# Altium PCB kitesp32_smartgarden.PcbDoc
Units mil, origin at the board's own origin, x right, y up, seen from the top; angles counter-clockwise.
Board outline 5245 x 4200 mil, 2 copper layers (Top Layer, Bottom Layer); 70 components, 49 nets, 356 pads, 70 vias.
Unrouted connection lines stored in the file: 3.
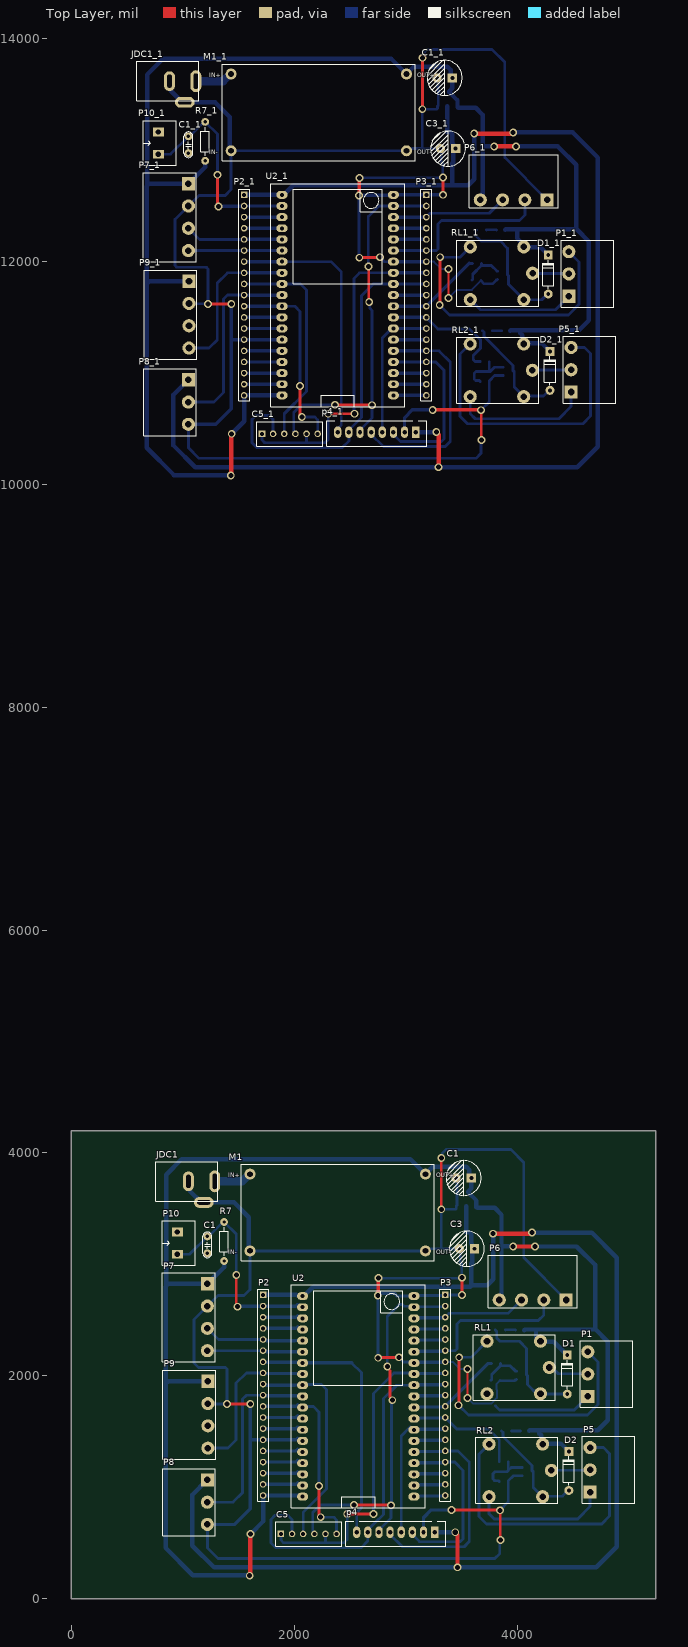
[diagram p0: Top Layer view]
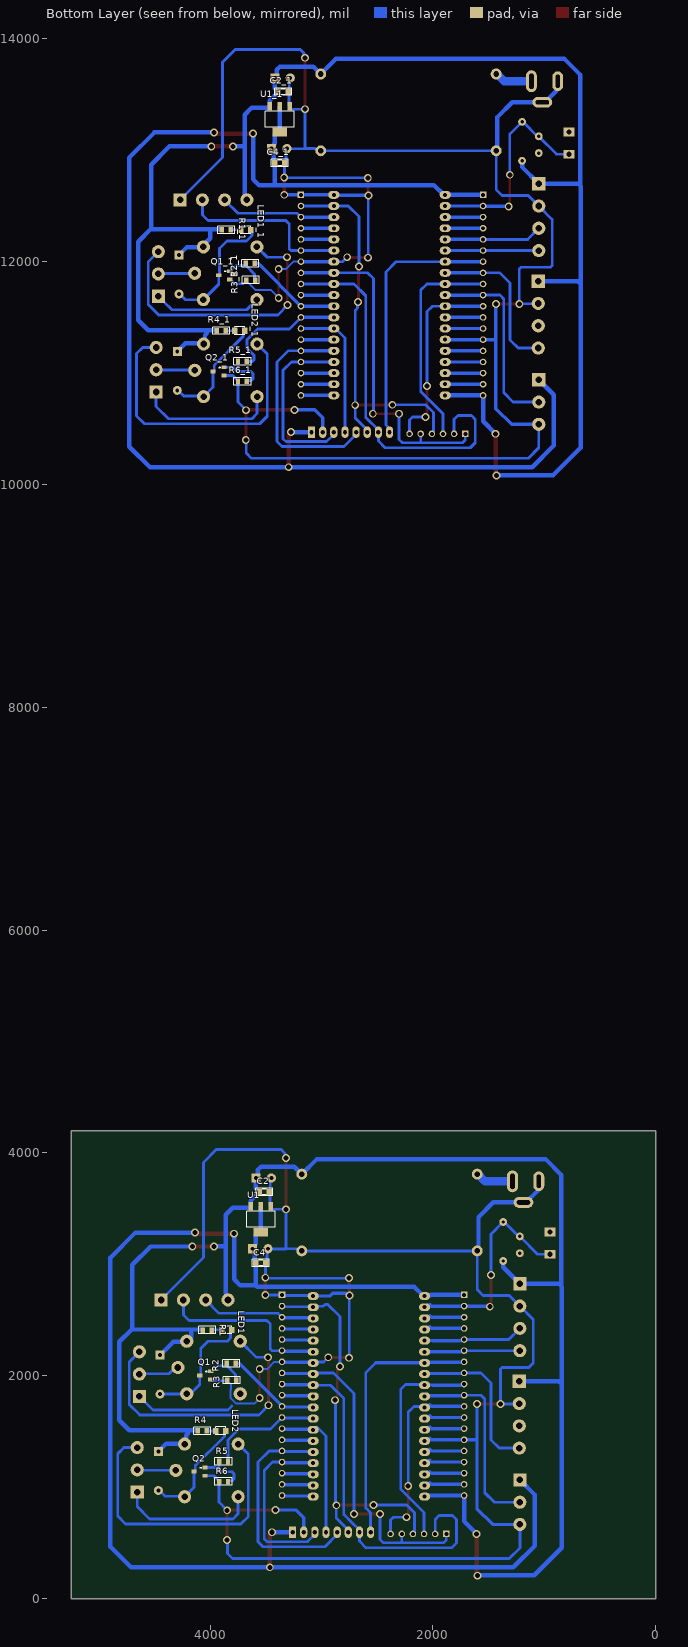
[diagram p1: Bottom Layer view, seen from below]

## Layer stack, top to bottom
Top Solder: solder mask 0.4, Solder Resist, Dk 3.5
Top Layer: signal copper 1.4
Dielectric 1: dielectric 12.6, FR-4, Dk 4.8
Bottom Layer: signal copper 1.4
Bottom Solder: solder mask 0.4, Solder Resist, Dk 3.5

## Board outline
0,0 5245,0 5245,4200 0,4200

## Design rules (kind name [scope] priority, off if disabled: settings)
Clearance [All] p1: gap=20 ignorepadtopadclearanceinfootprint=FALSE
PlaneClearance [InNet('GND')] p1: clearance=25
PlaneConnect [All] p1: planeconnectstyle=Direct reliefexpansion=20 reliefentries=4 reliefconductorwidth=10 reliefairgap=10
PolygonConnect [All] p1: connectstyle=Direct reliefconductorwidth=10 reliefentries=4 polygonreliefangle="90 Angle" airgapwidth=15
RoutingVias [All] p1: holewidth=28 width=50 viastyle="Through Hole" minholewidth=28 minwidth=50 maxholewidth=28 maxwidth=50
SolderMaskExpansion [All] p1: expansion=4 istentingtop=FALSE
Width [All] p1: maxlimit=40 minlimit=18 preferedwidth=25
28 further rules are at their usual default settings.

## Classes and differential pairs
component class esp32_doan: C1 C2 C3 C4 C5 D1 D2 JDC1 LED1 LED2 M1 P1 P2 P3 p4 P5 P6 P7 P8 P9 P10 Q1 Q2 R1 R2 R3 R4 R5 R6 R7 RL1 RL2 U1 U2

## Components (designator, comment, footprint, x,y, rotation, side; value= is the part's Value field where it differs from the comment)
C1 "104" CN1.5 1220,3100 r90 top value=0.1uF
C1 "100uF" "tu hoa 8mm" 3520,3775 r180 top
C1_1 "100uF" "tu hoa 8mm" 3350,13650 r180 top (schematic designator C1)
C1_1 "104" CN1.5 1050,12975 r90 top value=0.1uF (schematic designator C1)
C2 "104" 0805 3515,3650 r0 bottom value=0.1uF
C2_1 "104" 0805 3345,13525 r0 bottom value=0.1uF (schematic designator C2)
C3 "100uF" "tu hoa 8mm" 3550,3140 r180 top
C3_1 "100uF" "tu hoa 8mm" 3380,13015 r180 top (schematic designator C3)
C4 "104" 0805 3545,3010 r0 bottom value=0.1uF
C4_1 "104" 0805 3375,12885 r0 bottom value=0.1uF (schematic designator C4)
C5 "Header6" HDR6 1880,580 r0 top
C5_1 "Header6" HDR6 1710,10455 r0 top (schematic designator C5)
D1 "1N4007" D1A 4450,1835 r270 top
D1_1 "1N4007" D1A 4280,11710 r270 top (schematic designator D1)
D2 "1N4007" D1A 4465,970 r270 top
D2_1 "1N4007" D1A 4295,10845 r270 top (schematic designator D2)
JDC1 "Jack DC5.5x2.1" DC-IN 754.72,3567.83 r0 top
JDC1_1 "Jack DC5.5x2.1" DC-IN 584.72,13442.83 r0 top (schematic designator JDC1)
LED1 "LED" LED-0805-Orange 3895,2410 r180 bottom value="LED 3 - 5 ly 2 Colour"
LED1_1 "LED" LED-0805-Orange 3725,12285 r180 bottom value="LED 3 - 5 ly 2 Colour" (schematic designator LED1)
LED2 "LED" LED-0805-Orange 3950,1505 r180 bottom value="LED 3 - 5 ly 2 Colour"
LED2_1 "LED" LED-0805-Orange 3780,11380 r180 bottom value="LED 3 - 5 ly 2 Colour" (schematic designator LED2)
M1 "LM2596 MODULE" LM2596_MODULE 2390,3465 r0 top
M1_1 "LM2596 MODULE" LM2596_MODULE 2220,13340 r0 top (schematic designator M1)
P1 "Domino 3 pin" DOMINO_3PIN_5.08MM_RUT 4635,2015 r90 top
P1_1 "Domino 3 pin" DOMINO_3PIN_5.08MM_RUT 4465,11890 r90 top (schematic designator P1)
P2 "Header 19" HDR1X19 1720,2725 r270 top
P2_1 "Header 19" HDR1X19 1550,12600 r270 top (schematic designator P2)
P3 "Header 19" HDR1X19 3355,2725 r270 top
P3_1 "Header 19" HDR1X19 3185,12600 r270 top (schematic designator P3)
p4 "Connector" JST-XH_B8B-XH-A 2910,595 r180 top
p4_1 "Connector" JST-XH_B8B-XH-A 2740,10470 r180 top (schematic designator p4)
P5 "Domino 3 pin" DOMINO_3PIN_5.08MM_RUT 4655,1155 r90 top
P5_1 "Domino 3 pin" DOMINO_3PIN_5.08MM_RUT 4485,11030 r90 top (schematic designator P5)
P6 "ánh sáng" DOMINO_4PIN_5.08MM_RUT 4140,2680 r180 top
P6_1 "ánh sáng" DOMINO_4PIN_5.08MM_RUT 3970,12555 r180 top (schematic designator P6)
P7 "cảm biến mưa" DOMINO_4PIN_5.08MM_RUT 1220,2525 r270 top
P7_1 "cảm biến mưa" DOMINO_4PIN_5.08MM_RUT 1050,12400 r270 top (schematic designator P7)
P8 "DHT11" DOMINO_3PIN_5.08MM_RUT 1220,865 r270 top
P8_1 "DHT11" DOMINO_3PIN_5.08MM_RUT 1050,10740 r270 top (schematic designator P8)
P9 "Độ ẩm đất" DOMINO_4PIN_5.08MM_RUT 1225,1650 r270 top
P9_1 "Độ ẩm đất" DOMINO_4PIN_5.08MM_RUT 1055,11525 r270 top (schematic designator P9)
P10 "Header 2 - M" "Medium - Header 2" 950,3190 r90 top
P10_1 "Header 2 - M" "Medium - Header 2" 780,13065 r90 top (schematic designator P10)
Q1 "SOT23-C1815" SOT23B 4044,2003 r90 bottom
Q1_1 "SOT23-C1815" SOT23B 3874,11878 r90 bottom (schematic designator Q1)
Q2 "SOT23-C1815" SOT23B 4095,1140 r90 bottom
Q2_1 "SOT23-C1815" SOT23B 3925,11015 r90 bottom (schematic designator Q2)
R1 "R0805" "DIEN TRO 0805" 4025,2410 r0 bottom value=0805-1k
R1_1 "R0805" "DIEN TRO 0805" 3855,12285 r0 bottom value=0805-1k (schematic designator R1)
R2 "R0805" "DIEN TRO 0805" 3810,2110 r0 bottom value=0805-1k
R2_1 "R0805" "DIEN TRO 0805" 3640,11985 r0 bottom value=0805-1k (schematic designator R2)
R3 "R0805" "DIEN TRO 0805" 3805,1960 r0 bottom value=0805-10k
R3_1 "R0805" "DIEN TRO 0805" 3635,11835 r0 bottom value=0805-10k (schematic designator R3)
R4 "R0805" "DIEN TRO 0805" 4070,1505 r0 bottom value=0805-1k
R4_1 "R0805" "DIEN TRO 0805" 3900,11380 r0 bottom value=0805-1k (schematic designator R4)
R5 "R0805" "DIEN TRO 0805" 3880,1230 r0 bottom value=0805-1k
R5_1 "R0805" "DIEN TRO 0805" 3710,11105 r0 bottom value=0805-1k (schematic designator R5)
R6 "R0805" "DIEN TRO 0805" 3880,1050 r0 bottom value=0805-10k
R6_1 "R0805" "DIEN TRO 0805" 3710,10925 r0 bottom value=0805-10k (schematic designator R6)
R7 "10k" R1/4W 1370,3380 r270 top value="R1/4W - 1K"
R7_1 "10k" R1/4W 1200,13255 r270 top value="R1/4W - 1K" (schematic designator R7)
RL1 "MH" RELAY5PIN-10A 3976.06,2073.78 r90 top value="Relay ?V - 10A"
RL1_1 "MH" RELAY5PIN-10A 3826.06,11896.22 r90 top value="Relay ?V - 10A" (schematic designator RL1)
RL2 "MH" RELAY5PIN-10A 3995,1150 r90 top value="Relay ?V - 10A"
RL2_1 "MH" RELAY5PIN-10A 3825,11025 r90 top value="Relay ?V - 10A" (schematic designator RL2)
U1 "AMS1117_3V3" SOT223-4M 3545,3395 r0 bottom
U1_1 "AMS1117_3V3" SOT223-4M 3375,13270 r0 bottom (schematic designator U1)
U2 "ESP32-38PIN" ESP32-38PIN 2575,1815 r0 top
U2_1 "ESP32-38PIN" ESP32-38PIN 2390,11700 r0 top (schematic designator U2)

## Footprints (in the part's own frame and the unit in brackets; to place one, negate y for a bottom-side part, rotate by r counter-clockwise, add the part's x,y. Pads: shape width x height; smd on the part's side, far side on the other; paste and mask are expansions set on the pad)
0805 [mil] "Compoment SMD 80x50mil"
  rect 50x55 smd: 1(-45,0) 2(45,0)
  silkscreen extent -77,-34 76,33, body extent -40,-27 40,23, height 24
CN1.5 [mil]
  round 70 hole 31: 1(0,0) 2(150,0)
  silkscreen extent -40,-40 190,40, body extent -40,-33 190,33, height 235
D1A [mil] "Diode 1A, W 100mil, L 350mil"
  round 80 hole 35: 1(0,0)
  rect 80x80 hole 35: 2(-350,0)
  silkscreen extent -305,-50 -45,50, body extent -386,-33 34,36, height 84
DC-IN [mm] "Jac DC input"
  oval 2.5x5 hole 1 slot 3.5 at 90 deg: 1(13.5,4.5)
  oval 2.5x4.5 hole 1 slot 3 at 90 deg: 2(7.5,4.5)
  oval 4.5x2.5 hole 1 slot 3 at 0 deg: 3(11,-0.3)
  silkscreen extent 0,0 14.2,9, body extent 0,-0.5 13.83,9, height 11.02
"DIEN TRO 0805" [mil] "Chip Resistor; Body 2.0 x 1.3 mm (LxW typ)"
  rect 39.37x50 smd: 1(-40,0) 2(40,0)
  silkscreen extent -77,-33 77,33, body extent -39,-25 39,25, height 31
DOMINO_3PIN_5.08MM_RUT [mm]
  rect 3x3 hole 1.5: 1(-5.08,0)
  round 3 hole 1.5: 2(0,0) 3(5.08,0)
  silkscreen extent -7.62,-10.2 7.63,1.75, body extent -7.58,-10.25 7.57,1.75, height 3.15
DOMINO_4PIN_5.08MM_RUT [mm]
  rect 3x3 hole 1.5: 1(-7.62,0) 1(-7.62,0)
  round 3 hole 1.5: 2(-2.54,0) 2(-2.54,0) 3(2.54,0) 4(7.62,0)
  silkscreen extent -10.16,-10.25 10.16,1.75, body extent -10.12,-10.25 10.12,1.75, height 3.15
ESP32-38PIN [mil]
  oval 100x70.87 hole 36: 1(-500,900) 2(-500,800) 3(-500,700) 4(-500,600) 5(-500,500) 6(-500,400) 7(-500,300) 8(-500,200) 9(-500,100) 10(-500,0) 11(-500,-100) 12(-500,-200) 13(-500,-300) 14(-500,-400) 15(-500,-500) 16(-500,-600) 17(-500,-700) 18(-500,-800) 19(-500,-900) 20(500,-900) 21(500,-800) 22(500,-700) 23(500,-600) 24(500,-500) 25(500,-400) 26(500,-300) 27(500,-200) 28(500,-100) 29(500,0) 30(500,100) 31(500,200) 32(500,300) 33(500,400) 34(500,500) 35(500,600) 36(500,700) 37(500,800) 38(500,900)
  silkscreen extent -600,-1000 600,1000
HDR1X19 [mm] "Connector; Header; 19 Position"
  rect 1.5x1.5 hole 0.9: 1(0,0)
  round 1.5 hole 0.9: 2(2.54,0) 3(5.08,0) 4(7.62,0) 5(10.16,0) 6(12.7,0) 7(15.24,0) 8(17.78,0) 9(20.32,0) 10(22.86,0) 11(25.4,0) 12(27.94,0) 13(30.48,0) 14(33.02,0) 15(35.56,0) 16(38.1,0) 17(40.64,0) 18(43.18,0) 19(45.72,0)
  silkscreen extent -1.27,-1.27 46.99,1.27
HDR6 [mm] "Connector; Header; 6 Position"
  rect 1.5x1.5 hole 0.9: 1(0,0)
  round 1.5 hole 0.9: 2(2.54,0) 3(5.08,0) 4(7.62,0) 5(10.16,0) 6(12.7,0)
  silkscreen extent -1.14,-2.79 13.84,2.74, body extent -1.27,-2.92 13.97,2.88, height 11.72
JST-XH_B8B-XH-A [mm] "JST; XH series; 8 circuit; 2.54 Pitch; Through-hole type; Top entry"
  rect 1.65x2.65 hole 1: 1(-8.89,0)
  oval 1.65x2.65 hole 1: 2(-6.35,0) 3(-3.81,0) 4(-1.27,0) 5(1.27,0) 6(3.81,0) 7(6.35,0) 8(8.89,0)
  silkscreen extent -11.43,-2.54 11.43,3.18, body extent -11.2,-2.56 11.2,3.19, height 7
LED-0805-Orange [mil]
  rect 50x55 smd: 1(0,0) 2(90,0)
  silkscreen extent 0,-35 90,35, body extent 5,-25 85,25, height 43
LM2596_MODULE [mm]
  round 2.5 hole 1.3: 1(-20,8.75) 2(-20,-8.75) 3(20,-8.75) 4(20,8.75)
  silkscreen extent -22,-11 22,11, body extent -22,-11 22,11, height 10
"Medium - Header 2" [mm]
  rect 2x2.5 hole 1.2: 1(-2.54,0) 2(2.54,0)
  silkscreen extent -5.08,-4.08 5.08,3.43, body extent -5,-4.07 5,3.43, height 10
R1/4W [mil] "R 1/4W, 2 Pin, 350mil"
  round 70 hole 31: 1(0,0) 2(350,0)
  silkscreen extent 48,-38 302,38, body extent -40,-47 386,47, height 111
RELAY5PIN-10A [mm]
  round 3 hole 1.5: 1(0,-7.95) 2(-6,6.25) 3(6,6.25) 4(-6,-5.95) 5(6,-5.95)
  silkscreen extent -7.49,-9.35 7.51,9.35, body extent -7.49,-9.35 7.49,9.32, height 16
SOT23B [mm] "SOT 23B"
  rect 0.85x1.2 smd: 1(0.94,-1.245) 2(0,1.25) 3(-0.95,-1.25)
  silkscreen extent 0.77,-0.38 1.02,-0.13, body extent -1.5,-1.3 1.5,1.2, height 1.06
SOT223-4M [mm] "SOT223, 4-Leads, Body 6.5x3.5mm, Pitch 2.3mm, Lead Span 7mm, IPC Low Density"
  rect 1x2 smd: 1(-2.3,-3.2) 2(0,-3.2) 3(2.3,-3.2)
  rect 3.3x2 smd: 4(0,2.7)
  silkscreen extent -3.25,-2.05 3.26,1.55, body extent -3.25,-3.74 3.25,3.22, height 1.67
"tu hoa 8mm" [mm]
  rect 2.1x2.1 hole 0.9: 1(-1.75,0)
  round 2.1 hole 0.9: 2(1.75,0)
  silkscreen extent -4,-4 4,4, body extent -4.1,-4.07 4.1,4.13, height 13.81

## Part data
C1 C1_1: library part "Cap 104", "Capacitor (Semiconductor SIM Model)", LatestRevisionDate=17-Jul-2002, LatestRevisionNote="Re-released for DXP Platform.", PackageReference=C1206, Published=8-Jun-2000, Publisher="Altium Limited"
C1 C1_1 C3 C3_1: library part "Tu Hoa 100uF 50V 8x11", "Cắm", Chung_Loai=Cắm, Don_Vi=Con, Ma_Hang=MH006872, So_Chan=2, Ten_Linh_Kien="Tụ Hóa 100uF 50V 8x11MM"
C2 C2_1 C4 C4_1: library part "Cap 104_SMD", "Capacitor (Semiconductor SIM Model)", LatestRevisionDate=17-Jul-2002, LatestRevisionNote="Re-released for DXP Platform.", PackageReference=C1206, Published=8-Jun-2000, Publisher="Altium Limited"
C5 C5_1: "Header IDC, 6 x 1 Pin Vertical 2.54mm Pitch (Non-Boxed, Male)", Manufacturer="W¨¹rth Elektronik eiSos GmbH", partNo=613002143121, ComponentLink1 Description=Manufacturer, ComponentLink1URL=http://www.we-online.com, ComponentLink2 Description=Datasheet, ComponentLink2URL=http://katalog.we-online.de/em/datasheet/6130xx143121.pdf, Created by="Karrer Zheng", Created Date="29 March 2013", NoPins=02
D1 D1_1 D2 D2_1: library part "Diode 1A", "Diode 1A"
JDC1 JDC1_1: library part Jac_DC, "Cắm", Chung_Loai=Cắm, Don_Vi=Con, Ma_Hang=MH000923, Ten_Linh_Kien="Jack DC5.5x2.1MM DC5501"
LED1 LED1_1 LED2 LED2_1: library part "LED SMD"
M1 M1_1: library part LM2596_MODULE
P2 P2_1 P3 P3_1: "Header, 19-Pin", LatestRevisionDate=17-Jul-2002, LatestRevisionNote="Re-released for DXP Platform.", Publisher="Altium Limited"
p4 p4_1: library part Connector_8pin
P6 P6_1 P7 P7_1 P9 P9_1: library part "Domino 4 pin"
P8 P8_1: library part "Domino 3 pin"
P10 P10_1: "Header, 2-Pin, Medium", LatestRevisionDate=17-Jul-2002, LatestRevisionNote="Re-released for DXP Platform.", Publisher="Altium Limited"
Q1 Q1_1 Q2 Q2_1: library part C1815, "Dán", Chung_Loai=Dán, Don_Vi=Con, Ma_Hang=MH000946, Ten_Linh_Kien="C1815 SOT23 TRANS NPN 0.15A 50V (SMD-HF)"
R1 R1_1 R2 R2_1 R3 R3_1 R4 R4_1 R5 R5_1 R6 R6_1: "Resistor SMD 0805", LatestRevisionDate=17-Jul-2002, LatestRevisionNote="Re-released for DXP Platform.", PackageReference=AXIAL-0.4, Published=8-Jun-2000, Publisher="Altium Limited"
R7 R7_1: library part R1/4W, "Resistor 1/4W"
RL1 RL1_1 RL2 RL2_1: library part "Relay 10A", "Cắm"
U1 U1_1: "1A Regulator"

## Via types
v1: diameter 70, hole 45, Top Layer to Bottom Layer, 70 vias

## Nets (pads, with @x,y where several pads share a name; then routed paths per layer and width w, separated by ;. In a path a pad name is that pad's centre, name@x,y a point inside that pad or via, vN(x,y) a via of type N, cw(c..) or ccw(c..) an arc to the next point about the centre after c; other vN are vias at no path point)
+3V3: C3.1 C4.2 P2.1 p4.1 P8.1 U1.2 U1.4 U2.1 | length 12257
  Top Layer w40: v1(3445,595) 3445,592.29 3465,572.29 v1(3465,280) ; v1(3785,3275) 4122.29,3275 4132.29,3285 v1(4135,3285)
  Bottom Layer w40: P8.1 1085,930 1085,475 1280,280 v1(3465,280) 4710,280 4895,465 4895,3060 4670,3285 v1(4135,3285) ; P2.1 2017.08,2725 2021.17,2720.91 2069.09,2720.91 U2.1 2084.57,2715 2169.57,2800 3578.59,2800 3590,2811.41 ; p4.1 v1(3445,595) ; U1.2 U1.4 3570.59,3288.7 3589.96,3269.33 3589.96,3245.94 3590,3245.9 3590,3184.77 3597.56,3177.21 3597.56,3161.34 C3.1 ; C4.2 3590,2811.41 ; C4.2@3598.9,3010 C3.1@3598.9,3120 ; v1(3785,3275) 3785,2865 3731.41,2811.41 3590,2811.41 ; C3.1@3598.9,3120 C3.1 ; C3.1@3598.9,3120 C3.1
+5V: C1.1@3588.9,3775 C2.2 D1.2 D2.2 M1.4 P2.19 P6.4 P7.1 P9.1 R1.2 R4.2 R7.2 RL1.5 RL2.5 U1.3 U2.19 | length 15225.7
  Top Layer w40: v1(1600,205) 1605,210 1605,576.78 v1(1608.22,580) ; v1(3965,3160) v1(4160,3160)
  Bottom Layer w40: P9.1@1225,1950 870,1950 845,1925 ; R7.2 1370,2975 1220,2825 855,2825 850,2830 ; v1(1600,205) 1596.17,208.83 1582.03,208.83 1580.86,210 1090,210 845,455 845,1925 ; v1(1608.22,580) 1720,691.78 P2.19 2042.08,925 2052.08,915 U2.19 ; U1.3 U1.3@3635.55,3511.93 ; P6.4 3857.82,2697.82 3857.82,2739.02 3860,2741.2 3860,3160.68 ; v1(3965,3160) 3964.32,3160.68 3860,3160.68 ; R1.2 4070,2415 4170,2415 ; R4.2 4115,1510 4200,1510 ; v1(4160,3160) 4535,3160 4540.45,3154.55 4700,2995 4700,2415 ; D1.2 4329.37,2305.63 4214.69,2305.63 RL1.5 4196.19,2310 4170,2336.19 4170,2415 ; D2.2 4393.78,1391.22 4234.25,1391.22 RL2.5 4216.22,1399.25 4216.22,1464.79 4200,1481.01 4200,1510 ; 845,1925 845,1990 845,2800.02 850,2805.02 850,2830 ; 850,2830 850,2913.56 850,3805 990,3945 3041.89,3945 M1.4 3244.25,3876.34 3543.27,3876.34 3572.56,3847.05 3572.56,3791.34 3588.9,3775 3588.9,3680.93 3565.47,3657.5 3565,3657.5 3560,3652.5 C2.2 3560,3647.5 3635.24,3572.26 3635.24,3512.24 U1.3@3635.55,3511.93 ; U1.3@3635.55,3511.93 3640.87,3506.61 3798.39,3506.61 3860,3445 3860,3160.68 ; 4170,2415 4705,2415 4815,2305 4815,1600 4725,1510 4200,1510
+12: JDC1.1 M1.1 | length 343.1
  Bottom Layer w75: JDC1.1 1531.77,3745 1596.26,3809.49 M1.1
CLK: P3.19 U2.20 | length 284.1
  Bottom Layer w30: U2.20 3080,920 3350,920 P3.19
CMD: P2.18 U2.18 | length 371.6
  Bottom Layer w30: P2.18 2014.37,1025 2029.37,1040 2054.37,1015 U2.18
D0: P3.18 U2.21 | length 284.1
  Bottom Layer w30: U2.21 3080,1020 3350,1020 P3.18
D1: P3.17 U2.22 | length 284.1
  Bottom Layer w30: U2.22 3080,1120 3350,1120 P3.17
D2: P2.16 U2.16 | length 371.6
  Bottom Layer w30: P2.16 2014.37,1225 2029.37,1240 2054.37,1215 U2.16
D3: P2.17 U2.17 | length 371.6
  Bottom Layer w30: P2.17 2014.37,1125 2029.37,1140 2054.37,1115 U2.17
EN: C1.2@1220,3250 P2.2 P10.1 R7.1 U2.2 | length 1953.5
  Top Layer w25: v1(1480,2905) 1480,2636.76 1490,2626.76 v1(1490,2620)
  Bottom Layer w25: P10.1 1060,3090 1220,3250 1230,3250 1360,3380 R7.1 1480,3270 v1(1480,2905)
  Bottom Layer w30: v1(1490,2620) 1492.5,2622.5 1717.5,2622.5 P2.2 2014.37,2625 2029.37,2640 2054.37,2615 U2.2
GND: C1.1@1220,3100 C1.2@3451.1,3775 C2.1 C3.2 C4.1 JDC1.2 JDC1.3 M1.2 M1.3 P2.14 P3.1 P3.7 p4.2 P6.1 P7.2 P8.3 P9.2 P10.2 Q1.3 Q2.3 R3.2 R6.2 U1.1 U2.14 U2.32 U2.38 | length 19582.3
  Top Layer w18: v1(3555,1800) v1(3555,2060)
  Top Layer w25: v1(1395,1745) v1(1605,1745) ; v1(2753.75,2161.25) 2755.62,2163.12 2938.12,2163.12 v1(2940,2165) ; v1(3319.53,3494.11) 3319.77,3494.35 3319.77,3954.77 v1(3320,3955) ; v1(3847.19,792.19) 3848.59,790.78 3848.59,526.41 v1(3850,525)
  Top Layer w30: v1(2750,2720) 2752.5,2722.5 2752.5,2873.91 v1(2755,2876.41) ; v1(3412.5,795) 3844.38,795 v1(3847.19,792.19) ; v1(3505,2725) v1(3505,2725) 3505.04,2880.32 v1(3505.08,2880.36)
  Bottom Layer w18: P3.7 3423.73,2125 3488.73,2060 v1(3555,2060) ; v1(3555,1800) 3605.5,1749.5 3766.47,1749.5 3818.06,1801.09 3818.06,1874.03 3813.69,1878.4 3813.69,1923.37 3845,1954.69 R3.2
  Bottom Layer w25: P8.3 1220,455 1315,360 3800,360 3845.22,405.22 3845.22,520.22 v1(3850,525) ; P9.2@1225,1750 1227.5,1747.5 1392.5,1747.5 v1(1395,1745) 1395,2060.36 1380.36,2075 1140,2075 1100,2115 1100,2505 1220,2625 1315,2720 1550,2720 1602.6,2772.6 M1.2 M1.3 3191.45,3134.56 3223.32,3134.56 3228.76,3140 3320.18,3140 ; v1(2750,2720) 2751.88,2718.12 2751.88,2163.12 v1(2753.75,2161.25) ; v1(2755,2876.41) 2756.41,2875 3499.72,2875 v1(3505.08,2880.36) 3502.54,2882.89 3502.54,2995 C4.1@3510.22,2995 ; v1(2940,2165) 2981.22,2123.78 3066.22,2123.78 U2.32 ; v1(3320,3955) 3327.65,3962.65 3327.65,3995.98 3361.67,4030 3945,4030 4060,3915 4060,3060 P6.1@4440,2680 ; C1.2@3451.1,3775 3460.55,3765.55 3460.55,3659.45 C2.1 3461.63,3641.63 3461.63,3528.17 U1.1 3454.45,3501.3 3447.26,3494.11 v1(3319.53,3494.11) 3319.53,3140.64 3320.18,3140 ; C3.2 3490,3131.1 3490,3020 C4.1 ; C3.2@3482.46,3138.64 3321.53,3138.64 3320.18,3140 ; R3.2@3845,1954.69 3976.98,1954.69 3983.66,1961.37 3990.55,1961.37 Q1.3 ; v1(3847.19,792.19) 3920,865 3920,1055.31 3967.28,1102.6 Q2.3
  Bottom Layer w30: P8.3 1465,665 1605,805 1605,1425 ; v1(1605,1745) 1605,1425 ; U2.14 2054.37,1415 2029.37,1440 2014.37,1425 P2.14 1605,1425 ; v1(2750,2720) 2760.82,2720 2780.82,2740 2900.1,2740 2925.1,2715 U2.38 3080,2720 3350,2720 P3.1 v1(3505,2725) ; U2.32 3080,2120 3350,2120 P3.7 ; p4.2 3160,725 3230,795 v1(3412.5,795)
  Bottom Layer w40: JDC1.2 1061.18,3733.82 1061.18,3659.08 JDC1.3@1164.24,3556.02 ; JDC1.3 1458.98,3556.02 1591.42,3423.58 1591.42,3131.69 M1.2
IO0: P3.14 U2.25 | length 284.1
  Bottom Layer w30: U2.25 3080,1420 3350,1420 P3.14
IO2: P3.15 p4.5 U2.24 | length 2049.3
  Bottom Layer w25: p4.5 2860,575.31 2969.98,465.33 3525.33,465.33 3570,510 3570,1225 3470,1325 P3.15
  Bottom Layer w30: U2.24 3080,1320 3350,1320 P3.15
IO4: P3.13 p4.4 U2.26 | length 1307.4
  Bottom Layer w25: p4.4 2960,1459.57 3040.43,1540 3065.43,1515 U2.26
  Bottom Layer w30: U2.26 3080,1520 3350,1520 P3.13
IO05: P3.10 U2.29 | length 284.1
  Bottom Layer w30: U2.29 3080,1820 3350,1820 P3.10
IO12: P2.13 U2.13 | length 371.6
  Bottom Layer w30: P2.13 2014.37,1525 2029.37,1540 2054.37,1515 U2.13
IO13: P2.15 U2.15 | length 371.6
  Bottom Layer w30: P2.15 2014.37,1325 2029.37,1340 2054.37,1315 U2.15
IO14: P2.12 U2.12 | length 371.6
  Bottom Layer w30: P2.12 2014.37,1625 2029.37,1640 2054.37,1615 U2.12
IO15: P3.16 p4.3 U2.23 | length 1602
  Bottom Layer w25: p4.3 3060,575.31 3124.98,510.33 3490.33,510.33 3515,535 3515,1150 3440,1225 P3.16
  Bottom Layer w30: U2.23 3080,1220 3350,1220 P3.16
IO16: P3.12 R5.1 U2.27 | length 1047.2
  Bottom Layer w25: P3.12 3458.69,1521.31 3743.32,1521.31 3840.49,1424.14 3840.49,1348.3 3840,1347.81 R5.1
  Bottom Layer w30: U2.27 3080,1620 3350,1620 P3.12
IO17: P3.11 R2.1 U2.28 | length 865.7
  Bottom Layer w25: 3740,2110 R2.1
  Bottom Layer w30: U2.28 3080,1720 P3.11@3350,1720 ; P3.11 P3.11@3350,1720 ; 3740,2110 P3.11@3350,1720
IO18: C5.2 P3.9 p4.7 U2.30 | length 3419.7
  Bottom Layer w25: C5.2 1980,710 1945,745 1825,745 1790,710 1790,500 1835,455 2600,455 2660,515 2660,614.69 2725.2,679.89 2725.35,679.89 2800.31,754.85 2800.31,1795.77 2919.54,1915 U2.30
  Bottom Layer w30: U2.30 3080,1920 3350,1920 P3.9
IO19: C5.1 C5.5 P3.8 U2.31 | length 3026.7
  Top Layer w25: v1(2475,760) v1(2710,760)
  Bottom Layer w25: C5.1 1880,525 1905,500 2445,500 2475,530 v1(2475,760) ; 2280,500 C5.5 ; v1(2710,760) 2710,1840 2893.78,2023.78 3066.22,2023.78 U2.31
  Bottom Layer w30: U2.31 3080,2020 3350,2020 P3.8
IO23: C5.4 P3.2 p4.6 U2.37 | length 3512.6
  Top Layer w25: v1(2535,840) 2536.41,838.59 2866.41,838.59 v1(2867.81,837.19) ; v1(2835,2082.5) 2835,2070.36 2860,2045.36 2860,1812.18 2880,1792.18 v1(2880,1780)
  Bottom Layer w25: C5.4 2180,589.22 2165,604.22 2165,770 2235,840 v1(2535,840) ; p4.6 2760,614.69 2867.81,722.5 v1(2867.81,837.19) 2873.91,843.28 2873.91,1773.91 v1(2880,1780) ; v1(2835,2082.5) 2835,2530 2945,2640 2970,2640 2986.22,2623.78 3066.22,2623.78 U2.37 3080,2620 3350,2620 P3.2
IO25: C5.3 P2.9 U2.9 | length 1980.3
  Bottom Layer w25: U2.9@2072.5,1915 2077.5,1920 2245,1920 2290,1875 2290,982.04 2080,772.04 C5.3
  Bottom Layer w30: P2.9 1725.56,1919.44 1746.1,1919.44 1750.55,1915 2004.37,1915 2005.53,1916.15 2073.85,1916.15 U2.9
IO26: P2.10 P8.2 U2.10 | length 1748.8
  Bottom Layer w25: P8.2 1450,865 1535,950 1535,1790 1570,1825 P2.10
  Bottom Layer w30: P2.10 1725,1820 2070,1820 U2.10
IO27: C5.6 P2.11 U2.11 | length 1770.5
  Top Layer w25: v1(2222.5,1010) 2222.5,751.76 2237.5,736.76 v1(2237.5,730)
  Bottom Layer w25: U2.11 2083.78,1723.78 2171.22,1723.78 2222.5,1672.5 v1(2222.5,1010) ; v1(2237.5,730) 2355,730 2380,705 C5.6
  Bottom Layer w30: P2.11 2014.37,1725 2029.37,1740 2054.37,1715 U2.11
IO32: P2.7 p4.8 U2.7 | length 2373
  Bottom Layer w25: 2515,2115 2602.5,2027.5 2602.5,812.04 2560,769.54 p4.8
  Bottom Layer w30: P2.7 1725,2120 2049.37,2120 2054.37,2115 2515,2115
IO33: P2.8 P9.4 U2.8 | length 1432.5
  Bottom Layer w25: P9.4 1405,1350 1478.15,1423.15 1478.15,1933.15 1570,2025 P2.8
  Bottom Layer w30: P2.8 1725,2020 2070,2020 U2.8
IO34: P2.5 P7.3 U2.5 | length 901.5
  Bottom Layer w25: P7.3 1320,2325 P2.5
  Bottom Layer w30: P2.5 1725.56,2319.44 1746.1,2319.44 1750.55,2315 2004.37,2315 2005.53,2316.15 2073.85,2316.15 U2.5
IO35: P2.6 P7.4 U2.6 | length 860.1
  Bottom Layer w25: P7.4 P2.6
  Bottom Layer w30: P2.6 1725.56,2219.44 1746.1,2219.44 1750.55,2215 2004.37,2215 2005.53,2216.15 2073.85,2216.15 U2.6
IO36: P2.3 U2.3 | length 371.6
  Bottom Layer w30: P2.3 2014.37,2525 2029.37,2540 2054.37,2515 U2.3
IO39: P2.4 U2.4 | length 371.6
  Bottom Layer w30: P2.4 2014.37,2425 2029.37,2440 2054.37,2415 U2.4
NetD1_1: D1.1 LED1.2 Q1.2 RL1.4 | length 1113.5
  Bottom Layer w25: LED1.2 3817.5,2397.5 3817.5,2337.5 3845,2310 4020,2310 4084.93,2245.07 4084.93,2007.23 Q1.2@4093.21,1998.95 ; Q1.2 Q1.2@4093.21,1998.95 ; D1.1 4448.72,1836.28 4211.59,1836.28 RL1.4 4194.04,1837.56 4185.9,1829.42 4093.21,1922.1 Q1.2@4093.21,1998.95
NetD2_1: D2.1 LED2.2 Q2.2 RL2.4 | length 1006.7
  Bottom Layer w25: LED2.2 3872.5,1492.5 3872.5,1455.78 4134.04,1194.23 4134.04,1144.23 4138.28,1140 Q2.2 4144.21,998.82 RL2.4 4234.25,918.78 4406.62,918.78 4457.84,970 D2.1
NetLED1_1: LED1.1 R1.1 | length 93.5
  Bottom Layer w25: LED1.1 3895,2412.5 3982.5,2412.5 R1.1
NetLED2_1: LED2.1 R4.1 | length 80
  Bottom Layer w25: LED2.1 R4.1
NetP1_1: P1.1 RL1.2 | length 895
  Bottom Layer w25: 3805.33,1729.67 3841.56,1693.44 4513.44,1693.44 4588.44,1768.44 P1.1
NetP1_2: P1.2 RL1.1 | length 370.3
  Bottom Layer w25: RL1.1 4314.25,2073.78 4369.92,2018.11 4631.89,2018.11 P1.2
NetP1_3: P1.3 RL1.3 | length 2579.9
  Top Layer w25: v1(3475,1735) 3477.5,1737.5 3477.5,2162.5 v1(3480,2165)
  Bottom Layer w25: v1(3475,1735) 3562.78,1647.22 4631.3,1647.22 4726.56,1742.48 4726.56,2123.44 P1.3 ; v1(3480,2165) 3585,2165 RL1.3
NetP5_1: P5.1 RL2.2 | length 1253.4
  Bottom Layer w25: RL2.2 3748.94,761.06 3795,715 4545,715 4655,825 P5.1
NetP5_2: P5.2 RL2.1 | length 349.1
  Bottom Layer w25: RL2.1 4310.49,1152.5 4652.5,1152.5 P5.2
NetP5_3: P5.3 RL2.3 | length 2673.9
  Bottom Layer w25: RL2.3 3657.38,1294.67 3657.38,737.62 3725,670 4760,670 4830,740 4830,1300 4775,1355 P5.3
NetQ1_1: Q1.1 R2.2 R3.1 | length 350.9
  Bottom Layer w25: R3.1 3772.19,1967.19 3772.19,2012.19 R2.2@3850,2090 ; R2.2 R2.2@3850,2090 ; Q1.1 3988.11,2040 3938.11,2090 R2.2@3850,2090
NetQ2_1: Q2.1 R5.2 R6.1 | length 473.1
  Bottom Layer w25: R6.1 3840,1050.18 3832.81,1057.36 3799.64,1057.36 3785,1072.01 3785,1120 3803.45,1138.45 3910,1138.45 3920,1148.45 ; R5.2@3920,1224.69 3920,1148.45 ; Q2.1 3948.55,1177 3920,1148.45
RX: P3.5 U2.34 | length 284.1
  Bottom Layer w30: U2.34 3080,2320 3350,2320 P3.5
SCL: P3.3 P6.3 U2.36 | length 1033.3
  Bottom Layer w25: P3.3 3390,2560 3920,2560 P6.3
  Bottom Layer w30: U2.36 3080,2520 3350,2520 P3.3
SDA: P3.6 P6.2 U2.33 | length 1567.8
  Bottom Layer w25: P3.6 3445.36,2225 3460,2239.64 3460,2418.79 3460,2463.43 3491.57,2495 4190,2495 4240,2545 P6.2@4240,2680
  Bottom Layer w30: U2.33 3080,2220 3350,2220 P3.6
TX: P3.4 U2.35 | length 284.1
  Bottom Layer w30: U2.35 3080,2420 3350,2420 P3.4
pads on no net: C1_1.1 C1_1.2 C2_1.1 C2_1.2 C3_1.1 C3_1.2 C4_1.1 C4_1.2 C5_1.1 C5_1.2 C5_1.3 C5_1.4 C5_1.5 C5_1.6 D1_1.1 D1_1.2 D2_1.1 D2_1.2 JDC1_1.1 JDC1_1.2 JDC1_1.3 LED1_1.1 LED1_1.2 LED2_1.1 LED2_1.2 M1_1.1 M1_1.2 M1_1.3 M1_1.4 P1_1.1 P1_1.2 P1_1.3 P2_1.1 P2_1.2 P2_1.3 P2_1.4 P2_1.5 P2_1.6 P2_1.7 P2_1.8 P2_1.9 P2_1.10 P2_1.11 P2_1.12 P2_1.13 P2_1.14 P2_1.15 P2_1.16 P2_1.17 P2_1.18 P2_1.19 P3_1.1 P3_1.2 P3_1.3 P3_1.4 P3_1.5 P3_1.6 P3_1.7 P3_1.8 P3_1.9 P3_1.10 P3_1.11 P3_1.12 P3_1.13 P3_1.14 P3_1.15 P3_1.16 P3_1.17 P3_1.18 P3_1.19 p4_1.1 p4_1.2 p4_1.3 p4_1.4 p4_1.5 p4_1.6 p4_1.7 p4_1.8 P5_1.1 P5_1.2 P5_1.3 P6_1.1 P6_1.2 P6_1.3 P6_1.4 P7_1.1 P7_1.2 P7_1.3 P7_1.4 P8_1.1 P8_1.2 P8_1.3 P9.3 P9_1.1 P9_1.2 P9_1.3 P9_1.4 P10_1.1 P10_1.2 Q1_1.1 Q1_1.2 Q1_1.3 Q2_1.1 Q2_1.2 Q2_1.3 R1_1.1 R1_1.2 R2_1.1 R2_1.2 R3_1.1 R3_1.2 R4_1.1 R4_1.2 R5_1.1 R5_1.2 R6_1.1 R6_1.2 R7_1.1 R7_1.2 RL1_1.1 RL1_1.2 RL1_1.3 RL1_1.4 RL1_1.5 RL2_1.1 RL2_1.2 RL2_1.3 RL2_1.4 RL2_1.5 U1_1.1 U1_1.2 U1_1.3 U1_1.4 U2_1.1 U2_1.2 U2_1.3 U2_1.4 U2_1.5 U2_1.6 U2_1.7 U2_1.8 U2_1.9 U2_1.10 U2_1.11 U2_1.12 U2_1.13 U2_1.14 U2_1.15 U2_1.16 U2_1.17 U2_1.18 U2_1.19 U2_1.20 U2_1.21 U2_1.22 U2_1.23 U2_1.24 U2_1.25 U2_1.26 U2_1.27 U2_1.28 U2_1.29 U2_1.30 U2_1.31 U2_1.32 U2_1.33 U2_1.34 U2_1.35 U2_1.36 U2_1.37 U2_1.38
copper on no net: | length 95806.3
  Top Layer w18: v1(3385,11675) v1(3385,11935)
  Top Layer w25: v1(1225,11620) v1(1435,11620) ; v1(1310,12780) 1310,12511.76 1320,12501.76 v1(1320,12495) ; v1(2052.5,10885) 2052.5,10626.76 2067.5,10611.76 v1(2067.5,10605) ; v1(2305,10635) v1(2540,10635) ; v1(2365,10715) 2366.41,10713.59 2696.41,10713.59 v1(2697.81,10712.19) ; v1(2583.75,12036.25) 2585.62,12038.12 2768.12,12038.12 v1(2770,12040) ; v1(2665,11957.5) 2668.7,11953.8 2668.7,11641.3 v1(2672.39,11637.61) ; v1(3149.53,13369.11) 3149.77,13369.35 3149.77,13829.77 v1(3150,13830) ; v1(3305,11610) 3307.5,11612.5 3307.5,12037.5 v1(3310,12040) ; v1(3677.19,10667.19) 3678.59,10665.78 3678.59,10401.41 v1(3680,10400)
  Top Layer w30: v1(2580,12595) 2582.5,12597.5 2582.5,12748.91 v1(2585,12751.41) ; v1(3242.5,10670) 3674.38,10670 v1(3677.19,10667.19) ; v1(3335,12600) v1(3335,12600) 3335.04,12755.32 v1(3335.08,12755.36)
  Top Layer w40: v1(1430,10080) 1435,10085 1435,10451.78 v1(1438.22,10455) ; v1(3275,10470) 3275,10467.29 3295,10447.29 v1(3295,10155) ; v1(3615,13150) 3952.29,13150 3962.29,13160 v1(3965,13160) ; v1(3795,13035) v1(3990,13035)
  Bottom Layer w18: 3185,12000 3253.73,12000 3318.73,11935 v1(3385,11935) ; v1(3385,11675) 3458.06,11748.06 3593.75,11748.06 3643.69,11797.99 3643.69,11798.37 3675,11829.69 3675,11835
  Bottom Layer w25: 780,12965 890,12965 1050,13125 1060,13125 1190,13255 1200,13255 1310,13145 v1(1310,12780) ; 1050,10540 1050,10330 1145,10235 3630,10235 3675.22,10280.22 3675.22,10395.22 v1(3680,10400) ; 1050,10740 1280,10740 1365,10825 1365,11665 1400,11700 1550,11700 ; 1050,12100 1550,12100 ; 1050,12300 1150,12200 1550,12200 ; 1055,11225 1235,11225 1308.15,11298.15 1308.15,11808.15 1400,11900 1550,11900 ; 1055,11625 1057.5,11622.5 1222.5,11622.5 v1(1225,11620) 1225,11935.36 1210.36,11950 944.64,11950 930,11964.64 930,12380 1050,12500 1145,12595 1380,12595 1432.6,12647.6 1432.6,12995.51 3007.4,12995.51 3021.45,13009.56 3053.32,13009.56 3058.76,13015 3150.18,13015 ; 1710,10455 1710,10400 1735,10375 2275,10375 2305,10405 v1(2305,10635) ; 1810,10455 1810,10585 1775,10620 1655,10620 1620,10585 1620,10375 1665,10330 2430,10330 2490,10390 2490,10489.69 2603.16,10602.85 2603.16,11694.48 2708.68,11800 2890,11800 ; 1890,11600 2005,11600 2052.5,11552.5 v1(2052.5,10885) ; 1890,11800 2055,11800 2110,11745 2110,10835 1910,10635 1910,10455 ; 1890,12000 2330,12000 2422.5,11907.5 2422.5,10533 2390,10500.5 2390,10470 ; 2010,10455 2010,10464.22 1995,10479.22 1995,10645 2065,10715 v1(2365,10715) ; v1(2067.5,10605) 2185,10605 2210,10580 2210,10455 ; 2110,10375 2110,10455 ; v1(2540,10635) 2535,10640 2535,11850 2585,11900 2890,11900 ; v1(2580,12595) 2581.88,12593.12 2581.88,12038.12 v1(2583.75,12036.25) ; v1(2585,12751.41) 2586.97,12753.38 3333.1,12753.38 v1(3335.08,12755.36) 3332.54,12757.89 3332.54,12870 3340.22,12870 ; 2590,10470 2590,10489.69 2697.81,10597.5 v1(2697.81,10712.19) 2697.81,11562.61 2677.18,11583.25 2677.18,11632.82 v1(2672.39,11637.61) ; v1(2665,11957.5) 2665,12405 2760,12500 2890,12500 3185,12500 ; 2690,10470 2690,10450.31 2799.98,10340.33 3355.33,10340.33 3400,10385 3400,11100 3300,11200 3185,11200 ; v1(2770,12040) 2810,12000 2890,12000 ; 2790,10470 2790,11314.57 2875.43,11400 2890,11400 ; 2890,10470 2890,10450.31 2954.98,10385.33 3320.33,10385.33 3345,10410 3345,11025 3270,11100 3185,11100 ; v1(3150,13830) 3157.65,13837.65 3157.65,13870.98 3191.67,13905 3775,13905 3890,13790 3890,12935 4270,12555 ; 3185,11500 3288.69,11396.31 3573.32,11396.31 3670.49,11299.14 3670.49,11223.3 3607.19,11159.99 3607.19,11119.64 3621.83,11105 3670,11105 ; 3185,12100 3275.36,12100 3290,12114.64 3290,12293.79 3290,12338.43 3321.57,12370 4020,12370 4070,12420 4070,12555 ; 3185,12400 3220,12435 3750,12435 3870,12555 ; 3281.1,13650 3290.55,13640.55 3290.55,13534.45 3300,13525 3291.63,13516.63 3291.63,13403.17 3284.45,13395.98 3284.45,13376.3 3277.26,13369.11 v1(3149.53,13369.11) 3149.53,13015.64 3150.18,13015 ; v1(3305,11610) 3392.78,11522.22 4461.3,11522.22 4556.56,11617.48 4556.56,11998.44 4465,12090 ; v1(3310,12040) 3487.56,12040 3580,12132.44 ; 3311.1,13015 3320,13006.1 3320,12895 3330,12885 ; 3312.46,13013.64 3151.53,13013.64 3150.18,13015 ; 3570,11985 3600,11985 ; 3578.94,10788.78 3578.94,10636.06 3625,10590 4375,10590 4485,10700 4485,10830 ; 3578.94,11261.22 3487.38,11169.67 3487.38,10612.62 3555,10545 4590,10545 4660,10615 4660,11175 4605,11230 4485,11230 ; 3580,11660 3671.56,11568.44 4343.44,11568.44 4418.44,11643.44 4465,11690 ; 3595,11835 3602.19,11842.19 3602.19,11887.19 3680,11965 ; 3635,12285 3625.36,12275.36 3625.36,12234.64 3675,12185 3850,12185 3914.93,12120.07 3914.93,11882.23 3923.21,11873.95 3923.21,11797.1 4061.54,11658.78 4221.62,11658.78 4272.84,11710 4280,11710 ; 3670,10925 3670,10925.18 3662.81,10932.36 3629.64,10932.36 3615,10947.01 3615,10995 3633.45,11013.45 3740,11013.45 ; 3675,11829.69 3703.67,11801.01 3778.31,11801.01 3813.66,11836.37 3820.55,11836.37 3824.79,11840.6 ; v1(3677.19,10667.19) 3750,10740 3750,10930.31 3797.28,10977.6 3875.79,10977.6 ; 3680,11985 3680,11965 ; 3690,11380 3702.5,11367.5 3702.5,11330.78 3964.04,11069.23 3964.04,11019.23 3968.28,11015 3974.21,11015 3974.21,10873.82 4059.25,10788.78 4064.25,10793.78 4236.62,10793.78 4287.84,10845 4295,10845 ; 3725,12285 3725,12287.5 3812.5,12287.5 3815,12285 ; 3750,11099.69 3750,11023.45 3740,11013.45 ; 3780,11380 3860,11380 ; 3825,11915 3818.11,11915 3768.11,11965 3680,11965 ; 3876,11052 3797.69,11052 3759.13,11013.45 3740,11013.45 ; 4137.99,11025 4140.49,11027.5 4482.5,11027.5 4485,11030 ; 4139.06,11896.22 4142.17,11893.11 4461.89,11893.11 4465,11890
  Bottom Layer w30: 1050,10540 1295,10540 1435,10680 v1(1435,11620) ; v1(1320,12495) 1322.5,12497.5 1547.5,12497.5 1550,12500 1890,12500 ; 1435,11300 1890,11300 ; 1550,10900 1890,10900 ; 1550,11000 1890,11000 ; 1550,11100 1890,11100 ; 1550,11200 1890,11200 ; 1550,11400 1890,11400 ; 1550,11500 1890,11500 ; 1550,11600 1890,11600 ; 1550,11700 1890,11700 ; 1550,11800 1890,11800 ; 1550,11900 1890,11900 ; 1550,12000 1890,12000 ; 1550,12100 1890,12100 ; 1550,12200 1890,12200 ; 1550,12300 1890,12300 ; 1550,12400 1890,12400 ; v1(2580,12595) 2582.5,12597.5 2887.5,12597.5 2890,12600 3185,12600 v1(3335,12600) ; 2890,10800 3185,10800 ; 2890,10900 3185,10900 ; 2890,11000 3185,11000 ; 2890,11100 3185,11100 ; 2890,11200 3185,11200 ; 2890,11300 3185,11300 ; 2890,11400 3185,11400 ; 2890,11500 3185,11500 ; 2890,11600 3185,11600 3570,11985 ; 2890,11700 3185,11700 ; 2890,11800 3185,11800 ; 2890,11900 3185,11900 ; 2890,12000 3185,12000 ; 2890,12100 3185,12100 ; 2890,12200 3185,12200 ; 2890,12300 3185,12300 ; 2890,12400 3185,12400 ; 2990,10470 2990,10600 3060,10670 v1(3242.5,10670)
  Bottom Layer w40: 880,13620 891.18,13608.82 891.18,13534.08 994.24,13431.02 ; 1017.8,13431.02 1288.98,13431.02 1421.42,13298.58 1421.42,13006.69 1432.6,12995.51 ; 1050,10940 915,10805 915,10350 1110,10155 v1(3295,10155) 4540,10155 4725,10340 4725,12935 4500,13160 v1(3965,13160) ; 1055,11825 700,11825 675,11800 ; 1200,12905 1200,12850 1050,12700 685,12700 680,12705 ; v1(1430,10080) 1426.17,10083.83 1412.03,10083.83 1410.86,10085 920,10085 675,10330 675,11800 ; v1(1438.22,10455) 1550,10566.78 1550,10800 1890,10800 ; 1550,12600 1890,12600 1904.57,12600 1990.97,12686.41 3420,12686.41 ; 3090,10470 v1(3275,10470) ; 3375,13395.98 3375,13163.7 3400.59,13163.7 3419.96,13144.33 3419.96,13120.94 3420,13120.9 3420,13059.77 3427.56,13052.21 3427.56,13036.34 3448.9,13015 3428.9,12995 3428.9,12885 ; 3420,12885 3420,12686.41 ; 3465.55,13395.98 3465.55,13386.93 ; v1(3615,13150) 3615,12740 3561.41,12686.41 3420,12686.41 ; 3670,12555 3687.82,12572.82 3687.82,12614.02 3690,12616.2 3690,13035.68 ; v1(3795,13035) 3794.32,13035.68 3690,13035.68 ; 3895,12285 3900,12290 4000,12290 ; 3940,11380 3945,11385 4030,11385 ; v1(3990,13035) 4365,13035 4370.45,13029.55 4530,12870 4530,12290 ; 4280,12060 4208.78,12131.22 4061.54,12131.22 4060.31,12132.44 4060.31,12150.87 4000,12211.19 4000,12290 ; 4295,11195 4223.78,11266.22 4064.25,11266.22 4059.25,11261.22 4046.22,11274.25 4046.22,11339.79 4030,11356.01 4030,11385 ; 675,11800 675,11865 675,12675.02 680,12680.02 680,12705 ; 680,12705 680,12788.56 680,13680 820,13820 2871.89,13820 3007.4,13684.49 3074.25,13751.34 3373.27,13751.34 3402.56,13722.05 3402.56,13666.34 3418.9,13650 3418.9,13555.93 3395.47,13532.5 3395,13532.5 3390,13527.5 3390,13525 3390,13522.5 3465.24,13447.26 3465.24,13387.24 3465.55,13386.93 ; 3465.55,13386.93 3470.87,13381.61 3628.39,13381.61 3690,13320 3690,13035.68 ; 4000,12290 4535,12290 4645,12180 4645,11475 4555,11385 4030,11385
  Bottom Layer w75: 1116.22,13620 1361.77,13620 1426.26,13684.49 1432.6,13684.49

## Text inside footprints (layer, text, board x,y; h text height)
M1: Top Overlay "IN+" at 1405.75,3779.96 h39.37; Top Overlay "IN-" at 1405.75,3090.98 h39.37; Top Overlay "OUT+" at 3275.83,3779.96 h39.37; Top Overlay "OUT-" at 3275.83,3090.98 h39.37
M1_1: Top Overlay "OUT-" at 3105.83,12965.98 h39.37; Top Overlay "OUT+" at 3105.83,13654.96 h39.37; Top Overlay "IN-" at 1235.75,12965.98 h39.37; Top Overlay "IN+" at 1235.75,13654.96 h39.37